# Altium PCB STM32_PCB.PcbDoc
Units mm, origin at the board's own origin, x right, y up, seen from the top; angles counter-clockwise.
Board outline 50.27 x 52.76 mm, 4 copper layers (L1(Signal), L2(GND), L3(GND), L4(Signal)), stack 1.57 mm thick; 35 components, 27 nets, 170 pads, 318 vias.
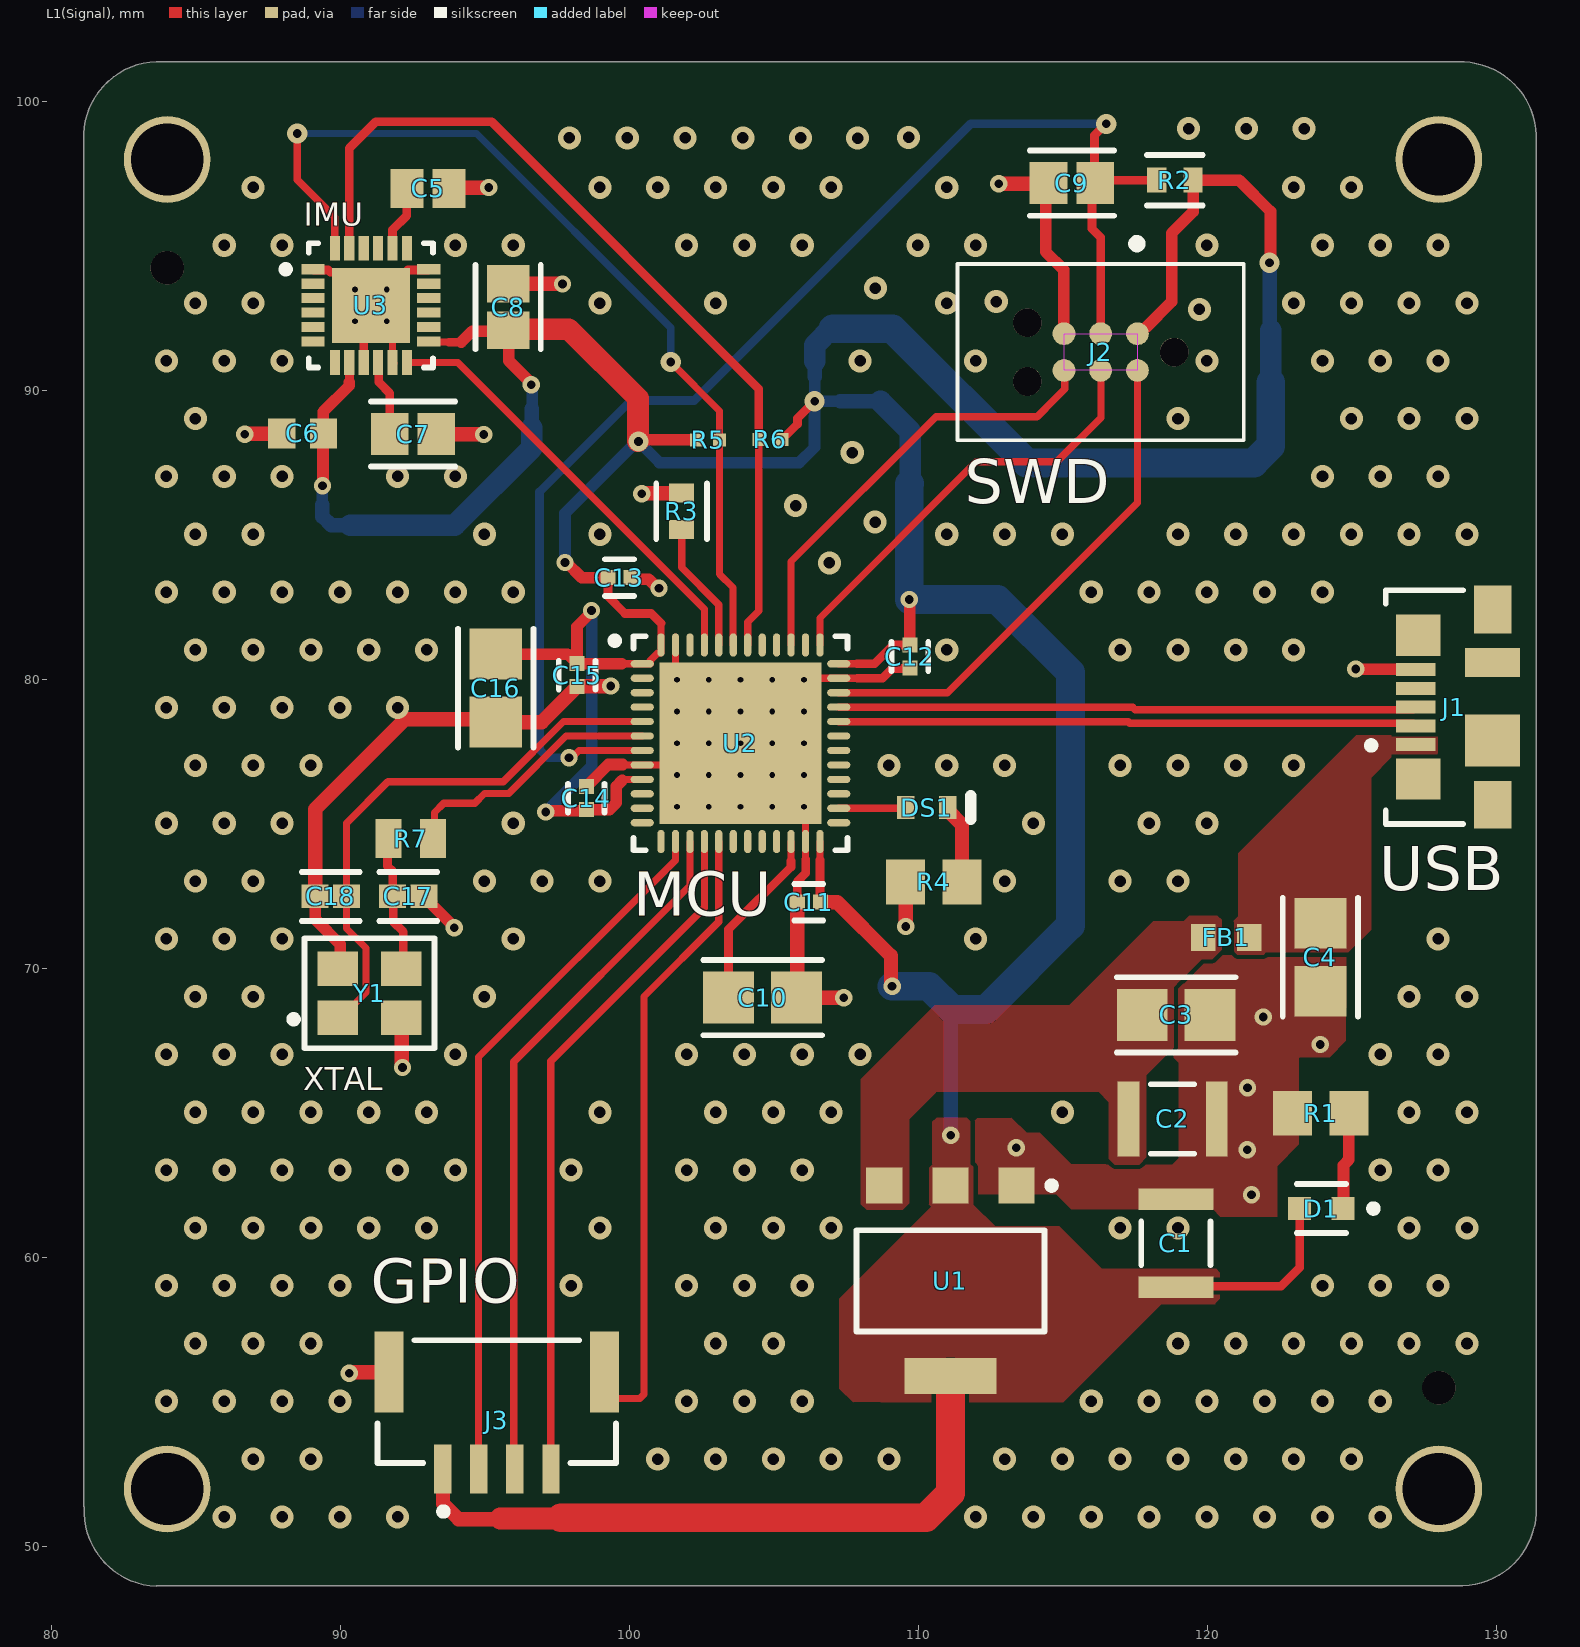
[diagram p0: L1(Signal) view]
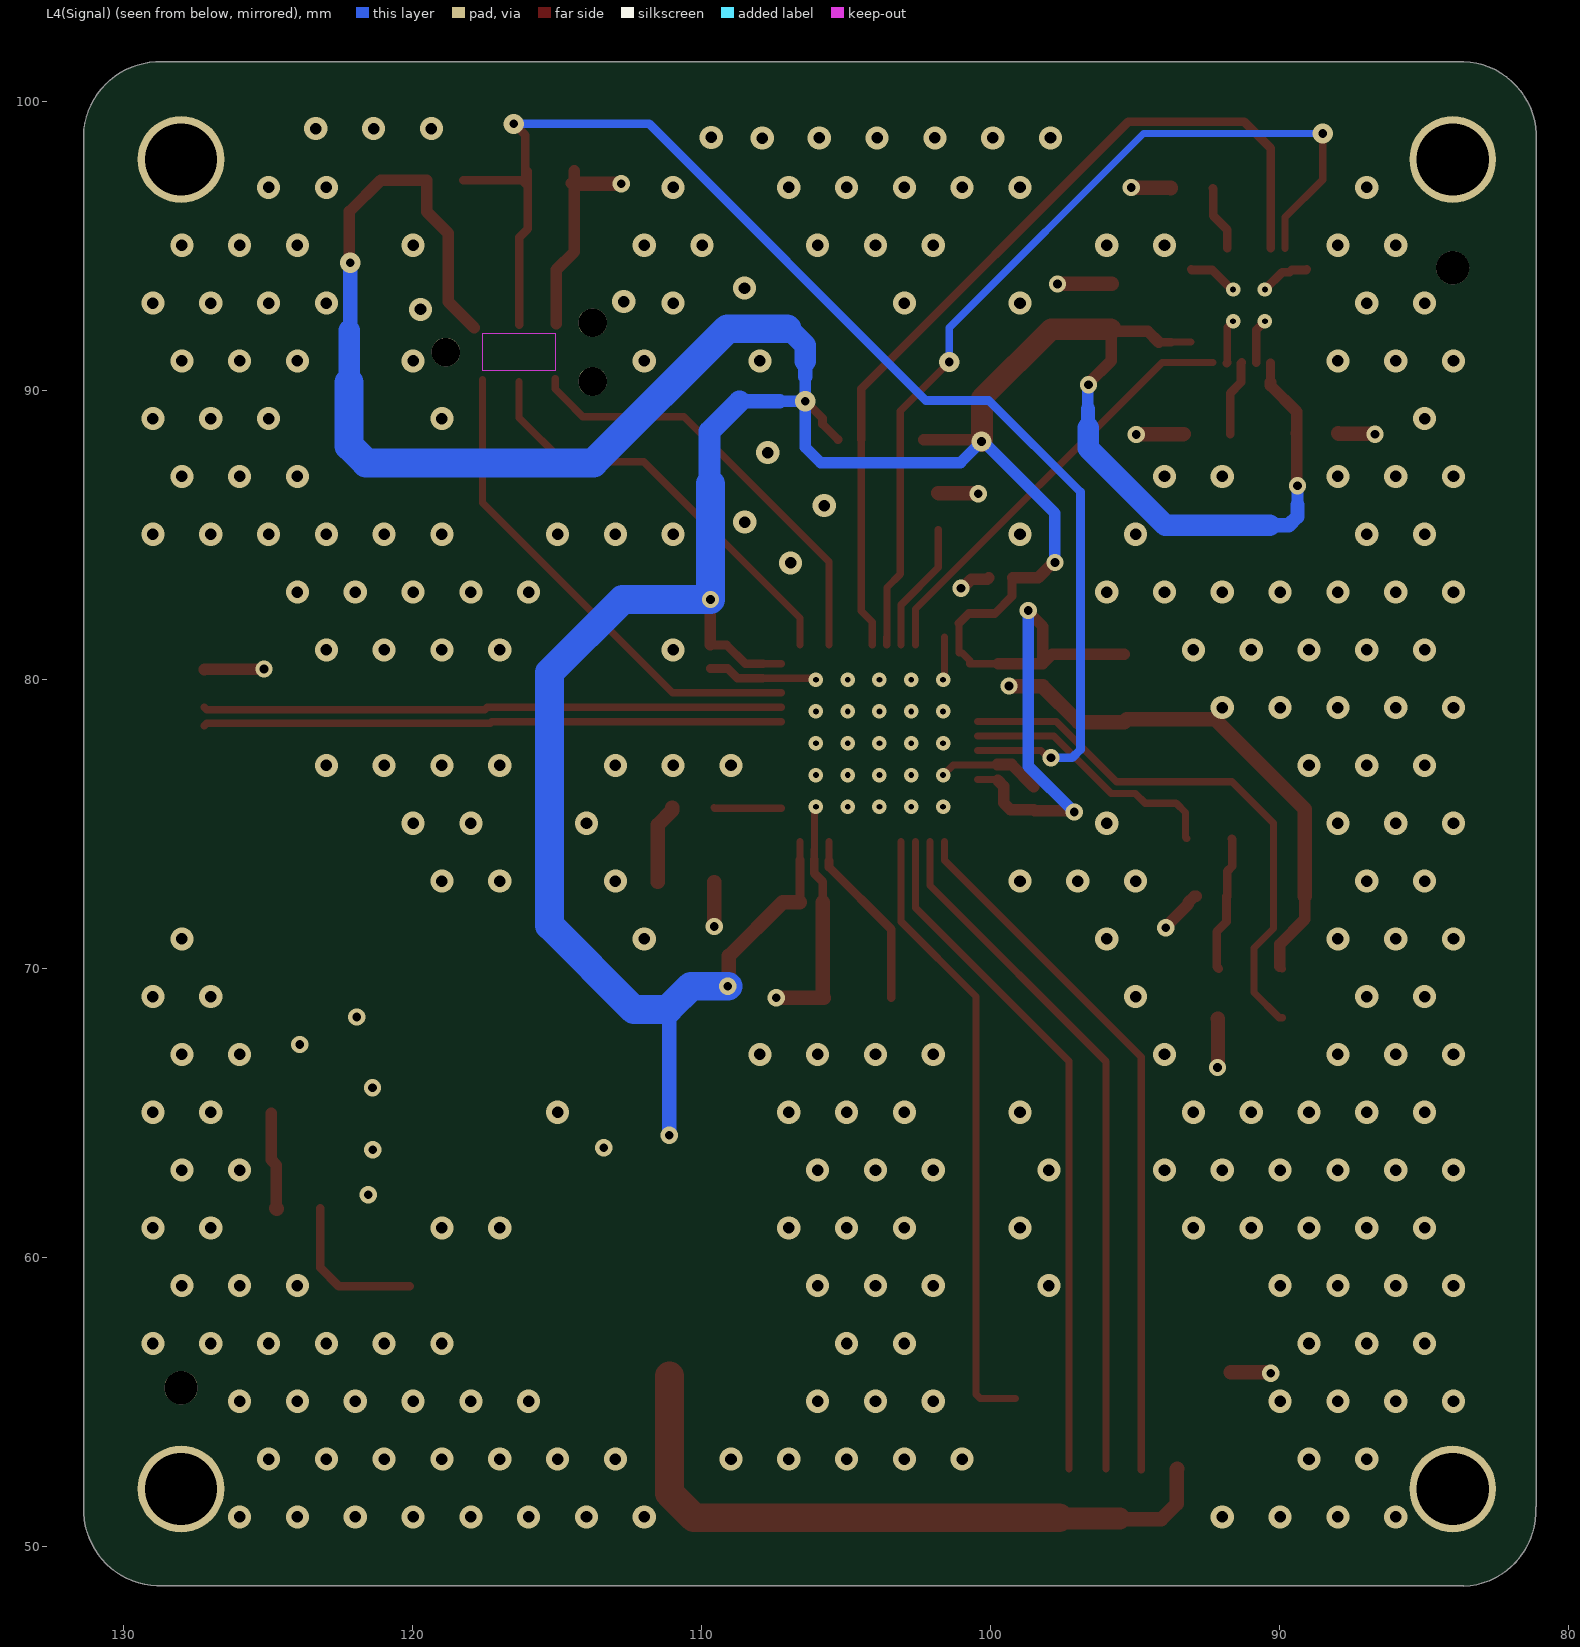
[diagram p1: L4(Signal) view, seen from below]
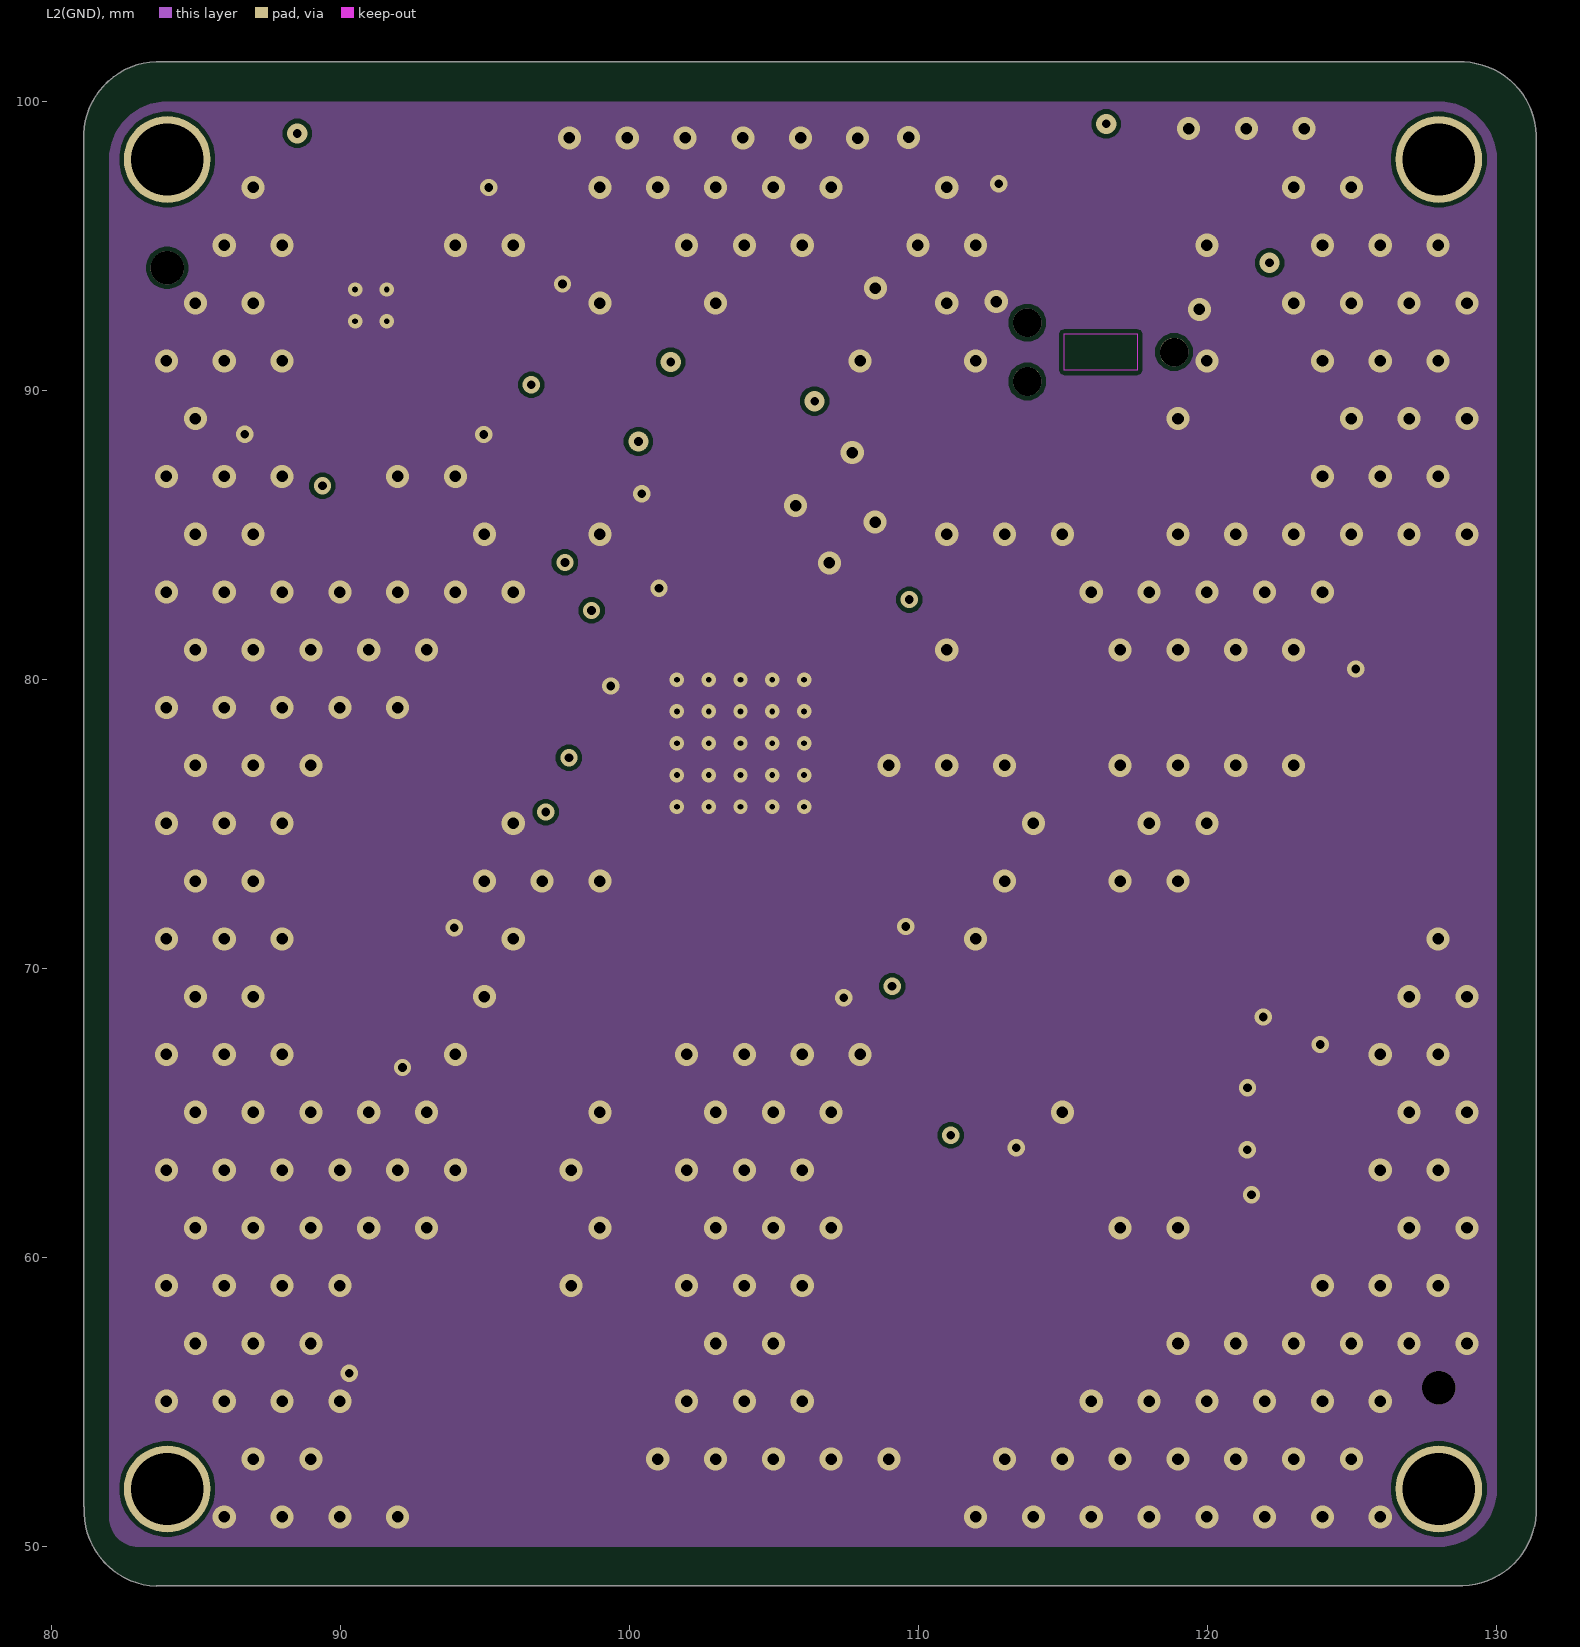
[diagram p2: L2(GND)]
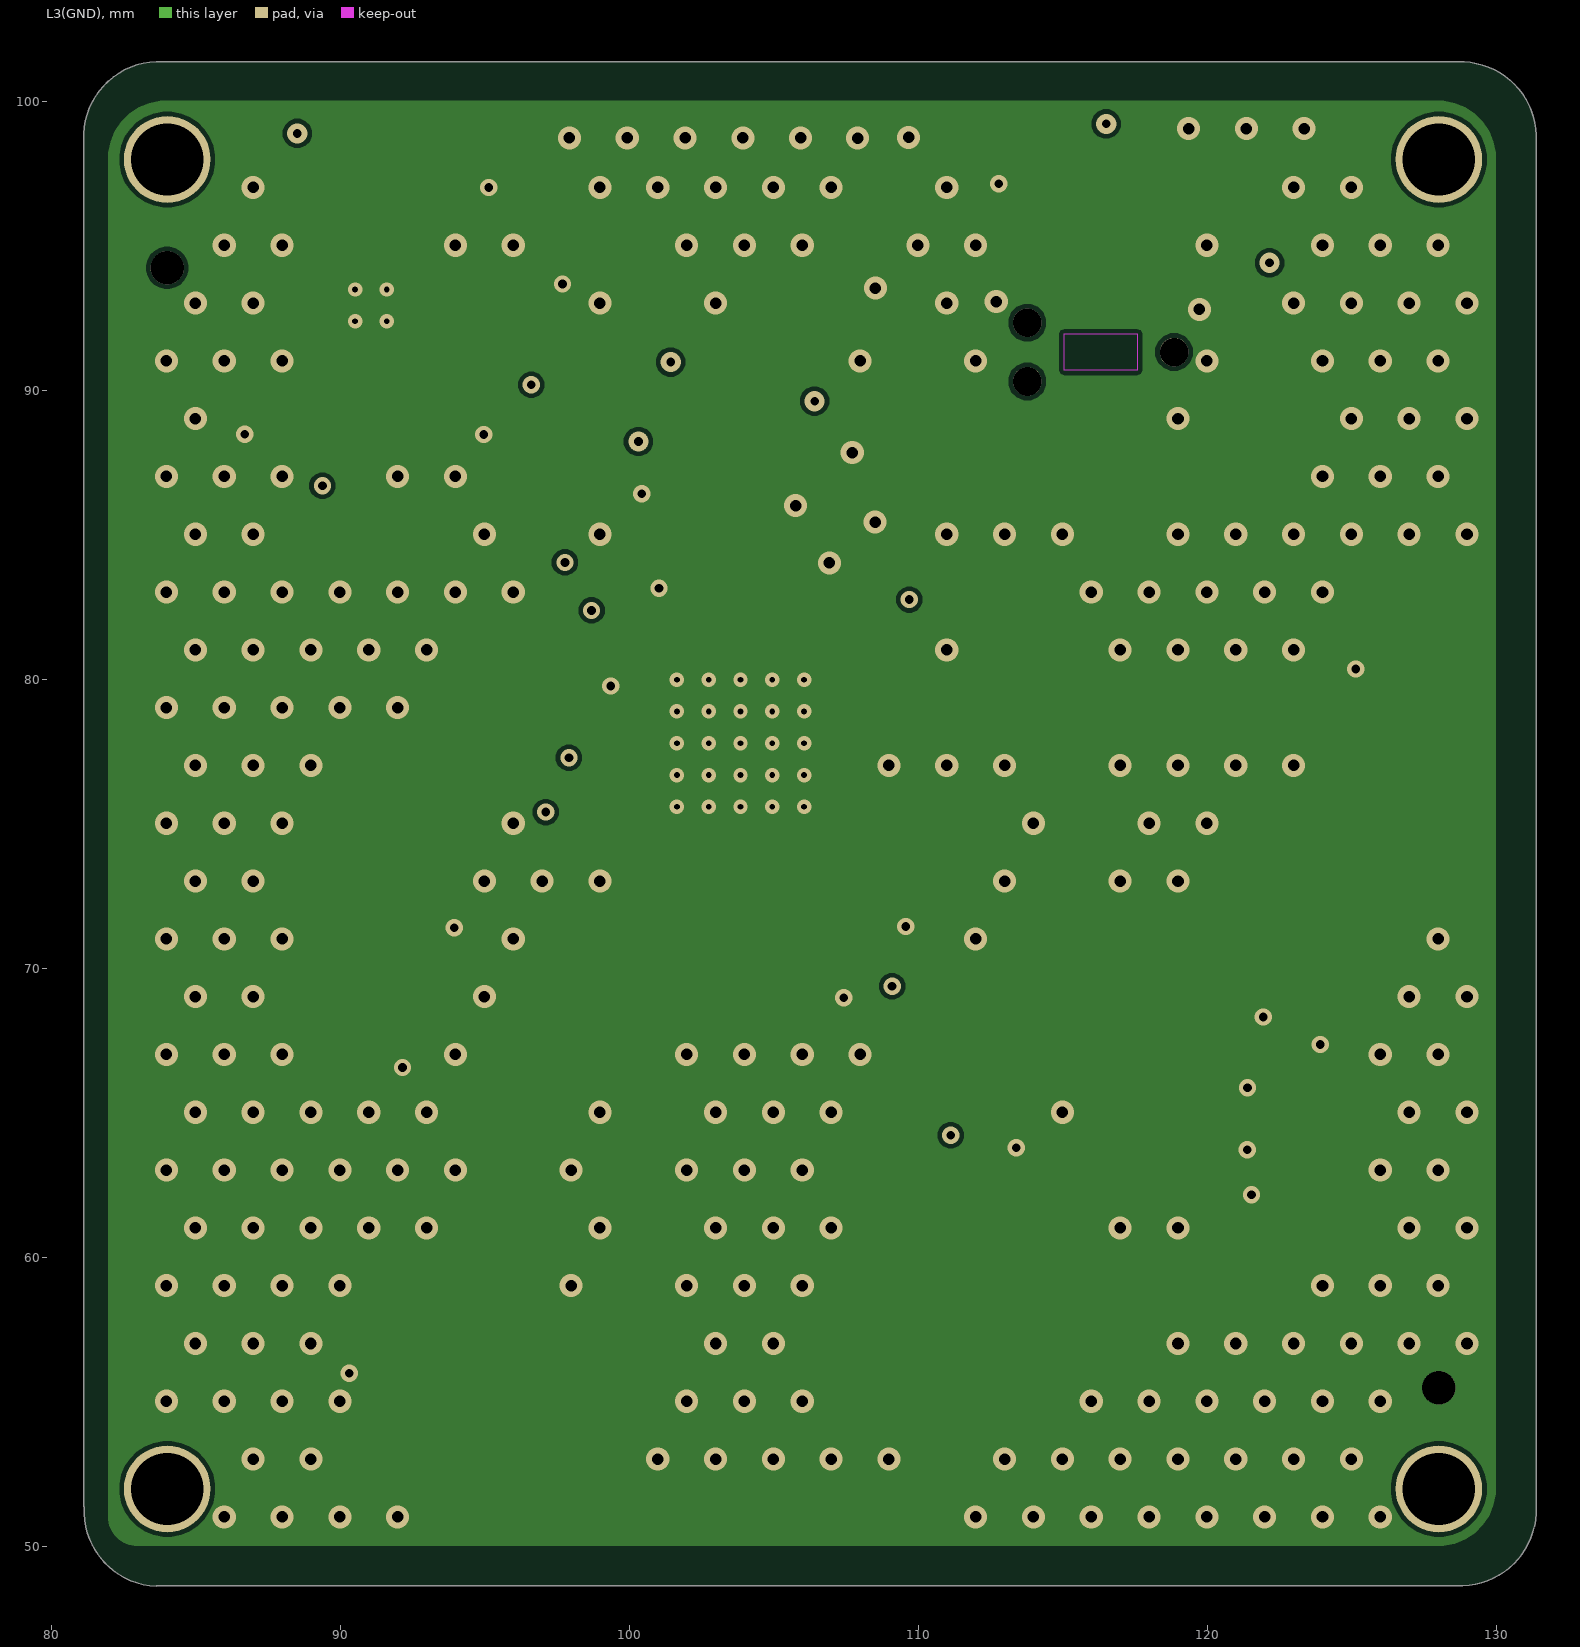
[diagram p3: L3(GND)]
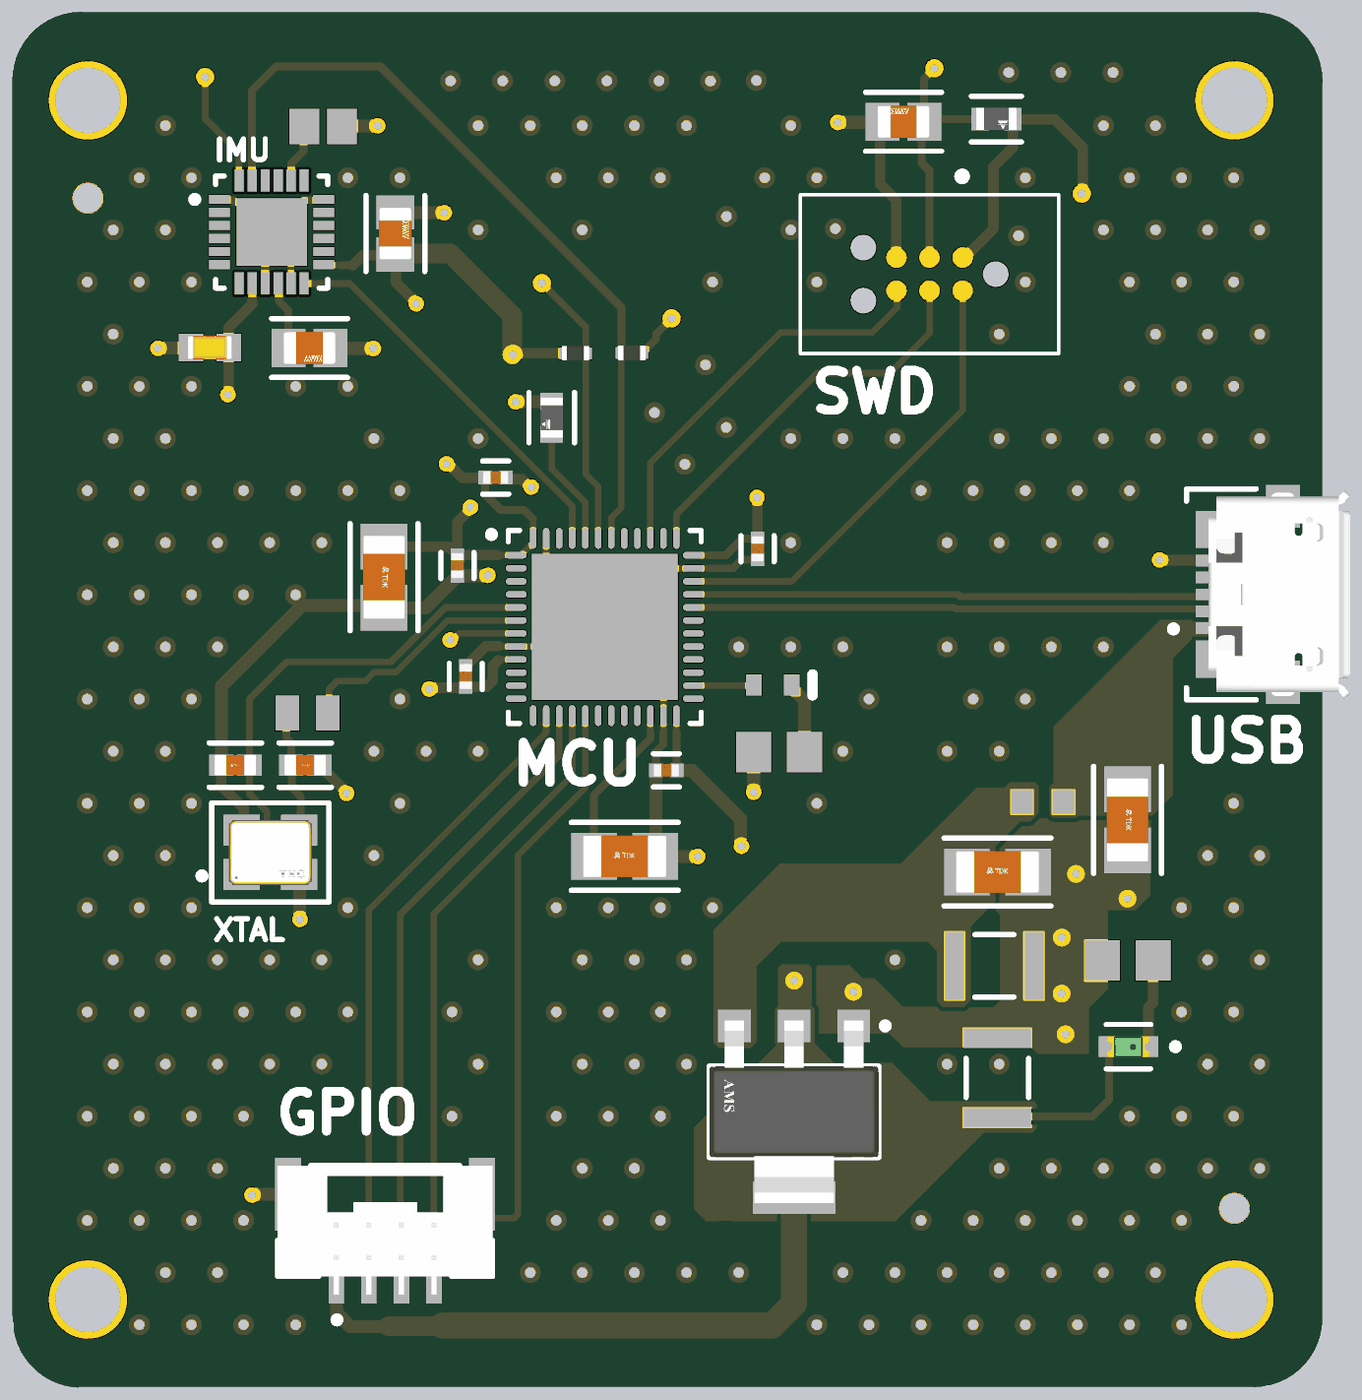
[diagram p4: 3D render of the assembled board from above, using the file's embedded part models]

## Layer stack, top to bottom
Top Solder: solder mask 0.0254, SM-001, Dk 4
L1(Signal): signal copper 0.035
Dielectric 1: prepreg 0.2, PP-017, Dk 4.6
L2(GND): signal copper 0.0175
Dielectric 3: core 1.065, Core-039, Dk 4.6
L3(GND): signal copper 0.0175
Dielectric 5: prepreg 0.2, PP-017, Dk 4.6
L4(Signal): signal copper 0.035
Bottom Solder: solder mask 0.0254, SM-001, Dk 4

## Board outline
81.125,51.375 ccw(c83.75,51.25) 83.625,48.625 83.625,48.649 128.617,48.649 ccw(c128.742,51.274) 131.367,51.149 131.367,98.625 131.375,98.625 ccw(c128.75,98.75) 128.875,101.375 128.875,101.387 83.856,101.387 ccw(c83.731,98.762) 81.106,98.887 81.106,51.375

## Design rules (kind name [scope] priority, off if disabled: settings)
Clearance [All] p1: gap=0.15 ignorepadtopadclearanceinfootprint=FALSE except(0.2: SMDPad-Via)
DiffPairsRouting [All] p1: maxlimit=0.254 minlimit=0.203 mostfreqgap=0.254 toplayer_maxgap=0.203 toplayer_prefgap=0.203 toplayer_minwidth=0.26 toplayer_maxwidth=0.26 toplayer_prefwidth=0.26 bottomlayer_maxgap=0.203 bottomlayer_prefgap=0.203 bottomlayer_minwidth=0.26 bottomlayer_maxwidth=0.26 bottomlayer_prefwidth=0.26 impedanceprofiledriven=TRUE impedanceprofileid={40CFBD0B-AFB4-4522-B9A7-42CAD4421D4E} impedanceprofilevalue=90.000000 maxuncoupledlength=12.7
MinimumSolderMaskSliver [All] p1: minsoldermaskwidth=0.03
PolygonConnect [All] p1: connectstyle=Direct reliefconductorwidth=0.254 reliefentries=4 polygonreliefangle="90 Angle" airgapwidth=0.254
RoutingVias [All] p1: holewidth=0.3 width=0.7 viastyle="Through Hole" minholewidth=0.2 minwidth=0.45 maxholewidth=0.5 maxwidth=0.9
SolderMaskExpansion [All] p1: expansion=0.04 istentingtop=FALSE
UnRoutedNet [All] p1: checkbadconnections=TRUE
Width [All] p1: maxlimit=1 minlimit=0.2 preferedwidth=0.3 midlayer1_minwidth=0.254 midlayer1_maxwidth=0.254 midlayer1_prefwidth=0.254 midlayer2_minwidth=0.254 midlayer2_maxwidth=0.254 midlayer2_prefwidth=0.254 minimp=50.000000 maximp=50.000000 favimp=50.000000
27 further rules are at their usual default settings.

## Classes and differential pairs
net class USB_DIFF: NetJ1_3 USB_D_N USB_D_P
differential pair USB_D: +USB_D_P -USB_D_N

## Components (designator, comment, footprint, x,y, rotation, side; value= is the part's Value field where it differs from the comment)
C1 "GRM32ER61C226KE20L" MURA-1210_H_2.7_L 118.9,60.5 r90 top
C2 "GRM32ER61C226KE20L" MURA-1210_H_2.7_L 118.785,64.8 r0 top
C3 "2u2" FP-C3216-160-0_2-IPC_B 118.909,68.4 r0 top
C4 "2u2" FP-C3216-160-0_2-IPC_B 123.9,70.4 r270 top
C5 "2n2" CAPC2013X94X50LL20T25 93.025,97 r180 top
C6 "10nF" CAPC1608X90X35ML10T15 88.683,88.519 r0 top
C7 "100nF" FP-0805-L_2_01_0_2-W_1_25-IPC_B 92.506,88.5 r0 top
C8 "100nF" FP-0805-L_2_01_0_2-W_1_25-IPC_B 95.8,92.894 r90 top
C9 "100nF" FP-0805-L_2_01_0_2-W_1_25-IPC_B 115.302,97.182 r180 top
C10 "2u2" FP-C3216-160-0_2-IPC_B 104.6,69 r0 top
C11 "100nF" FP-C0402-BB-MFG 106.2,72.3 r180 top value="0.10 μF"
C12 "100nF" FP-C0402-BB-MFG 109.7,80.8 r270 top value="0.10 μF"
C13 "100nF" FP-C0402-BB-MFG 99.649,83.531 r0 top value="0.10 μF"
C14 "100nF" FP-C0402-BB-MFG 98.5,75.9 r90 top value="0.10 μF"
C15 "100nF" FP-C0402-BB-MFG 98.18,80.157 r270 top value="0.10 μF"
C16 "2.2uF" FP-C3216-160-0_2-IPC_B 95.366,79.71 r270 top
C17 "C1608C0G1H100D080AA" FP-C1608-080-0_1-IPC_C 92.341,72.5 r180 top
C18 "C1608C0G1H100D080AA" FP-C1608-080-0_1-IPC_C 89.659,72.5 r0 top
D1 "LTST-C190GKT" FP-LTST-C190GKT-MFG 123.935,61.7 r180 top
DS1 "TLMS1100-GS08" VISH-TLMX1100_V 110.284,75.577 r0 top
FB1 "FBMH1608HL300-T" BEADC1608X90N 120.644,71.084 r180 top
J1 "473460001" FP-473460001-MFG 129.51,79.05 r90 top
J2 "TC2030-IDC-NL" TAG_TC2030-IDC-NL 116.3,91.335 r180 top
J3 "BM04B-GHS-TBT(LF)(SN)" FP-BM04B-GHS-TBT_LF_SN-MFG 95.406,55.018 r180 top
R1 "ERJ-6ENF1001V" RESC2013X70X40ML20T20 123.91,65 r0 top
R2 "10k" FP-MCT0603-IPC_C 118.866,97.282 r0 top
R3 "10k" FP-MCT0603-IPC_C 101.8,85.829 r270 top
R4 "ERJ-6ENF1001V" RESC2013X70X40ML20T20 110.525,73 r180 top
R5 "ERJ-2RKF2201X" RESC1005X40X25LL05T05 102.714,88.296 r180 top
R6 "ERJ-2RKF2201X" RESC1005X40X25LL05T05 104.871,88.311 r0 top
R7 "CRG0805ZR" RESC2013X65X40LL15T20 92.425,74.5 r0 top
U1 "ams1117" FP-ams1117-IPC_C 111.1,59.2 r270 top
U2 "STM32F411CEU6" STM-UFQFPN48_L 103.836,77.8 r0 top
U3 "MPU-6050" IS-QFN-24_V 91.05,92.95 r0 top
Y1 "7M-24.000MEEQ-T" FP-7M-MFG 91,69.15 r0 top

## Footprints (in the part's own frame and the unit in brackets; to place one, negate y for a bottom-side part, rotate by r counter-clockwise, add the part's x,y. Pads: shape width x height; smd on the part's side, far side on the other; paste and mask are expansions set on the pad)
BEADC1608X90N [mm]
  rect 0.84x0.93 smd: 1(-0.795,0) 2(0.795,0)
CAPC1608X90X35ML10T15 [mm] "Chip Capacitor, 2-Leads, Body 1.7x0.9mm, IPC Low Density"
  rect 0.95x1.05 smd: 1(-0.725,0) 2(0.725,0)
  body extent -0.85,-0.45 0.85,0.45, height 0.9
CAPC2013X94X50LL20T25 [mm] "Chip Capacitor, 2-Leads, Body 2.01x1.25mm, IPC High Density"
  rect 1.15x1.35 smd: 1(-0.725,0) 2(0.725,0)
  body extent -1.1,-0.72 1.1,0.72, height 0.94
FP-7M-MFG [mm]
  rect 1.4x1.2 smd paste+0 mask+0: 1(-1.1,-0.85) 2(1.1,-0.85) 3(1.1,0.85) 4(-1.1,0.85)
  silkscreen extent -2.75,-1.9 2.25,1.9, body extent -1.9,-1.55 1.9,1.55, height 0.25
FP-0805-L_2_01_0_2-W_1_25-IPC_B [mm]
  rect 1.305x1.456 smd paste+0 mask+0: 1(-0.806,0) 2(0.806,0)
  silkscreen extent -1.46,-1.13 1.46,1.13, body extent -1.71,-0.98 1.71,0.98, height 0.25
FP-473460001-MFG [mm]
  rect 0.45x1.38 smd paste+0 mask+0: 1(-1.3,2.31) 2(-0.65,2.31) 3(0,2.31) 4(0.65,2.31) 5(1.3,2.31)
  rect 1.425x1.55 smd paste+0 mask+0: 6(-2.488,2.225) 7(2.488,2.225)
  rect 1.65x1.3 smd paste+0 mask+0: 8(-3.375,-0.35) 11(3.375,-0.35)
  rect 1.8x1.9 smd paste+0 mask+0: 9(-1.15,-0.35)
  rect 1x1.9 smd paste+0 mask+0: 10(1.55,-0.35)
  silkscreen extent -4.05,0.67 4.05,3.97, body extent -4.3,-2.48 4.3,3.45, height 0.25
FP-ams1117-IPC_C [mm]
  rect 1.25x1.25 smd paste+0 mask+0: 1(-3.295,2.29) 2(-3.295,0) 3(-3.295,-2.29)
  rect 1.25x3.182 smd paste+0 mask+0: 4(3.295,0)
  silkscreen extent -3.42,-3.25 1.75,3.63, body extent -3.9,-3.35 3.9,3.35, height 0.25
FP-BM04B-GHS-TBT_LF_SN-MFG [mm]
  rect 0.6x1.7 smd paste+0 mask+0: 1(1.875,2.325) 2(0.625,2.325) 3(-0.625,2.325) 4(-1.875,2.325)
  rect 1x2.8 smd paste+0 mask+0: 5(-3.725,-1.025) 6(3.725,-1.025)
  silkscreen extent -4.13,-2.12 4.13,3.92, body extent -4.33,-2.52 4.33,3.27, height 0.25
FP-C0402-BB-MFG [mm]
  rect 0.52x0.52 smd paste+0 mask+0: 1(-0.4,0) 2(0.4,0)
  silkscreen extent -0.5,-0.64 0.5,0.64, body extent -0.8,-0.4 0.8,0.4, height 0.25
FP-C1608-080-0_1-IPC_C [mm]
  rect 0.931x0.812 smd paste+0 mask+0: 1(-0.541,0) 2(0.541,0)
  silkscreen extent -1.01,-0.85 1.01,0.85, body extent -1.11,-0.55 1.11,0.55, height 0.25
FP-C3216-160-0_2-IPC_B [mm]
  rect 1.754x1.806 smd paste+0 mask+0: 1(-1.176,0) 2(1.176,0)
  silkscreen extent -2.05,-1.3 2.05,1.3, body extent -2.3,-1.15 2.3,1.15, height 0.25
FP-LTST-C190GKT-MFG [mm]
  rect 0.8x0.8 smd paste+0 mask+0: 1(-0.75,0) 2(0.75,0)
  silkscreen extent -1.92,-0.85 0.85,0.85, body extent -1.25,-0.55 1.25,0.55, height 0.25
FP-MCT0603-IPC_C [mm]
  rect 0.664x0.862 smd paste+0 mask+0: 1(-0.629,0) 2(0.629,0)
  silkscreen extent -0.96,-0.87 0.96,0.87, body extent -1.06,-0.58 1.06,0.58, height 0.25
IS-QFN-24_V [mm] "QFN, 24-Leads, Body 4x4mm, Pitch 0.5mm, Thermal Pad 2.7x2.6mm"
  rect 0.8x0.35 smd: 1(-2,1.25) 2(-2,0.75) 3(-2,0.25) 4(-2,-0.25) 5(-2,-0.75) 6(-2,-1.25) 13(2,-1.25) 14(2,-0.75) 15(2,-0.25) 16(2,0.25) 17(2,0.75) 18(2,1.25)
  rect 0.35x0.85 smd mask+0.102: 7(-1.25,-1.975) 8(-0.75,-1.975) 9(-0.25,-1.975) 10(0.25,-1.975) 11(0.75,-1.975) 12(1.25,-1.975) 19(1.25,1.975) 20(0.75,1.975) 21(0.25,1.975) 22(-0.25,1.975) 23(-0.75,1.975) 24(-1.25,1.975)
  rect 2.7x2.6 smd: 25(0,0)
  silkscreen extent -3.07,-2.15 2.15,2.15, body extent -2,-2 2,2, height 0.95
MURA-1210_H_2.7_L [mm] "Chip Capacitor, 2-Leads, Body 3.5x2.7mm, IPC High Density"
  rect 0.75x2.6 smd: 1(-1.525,0) 2(1.525,0)
  silkscreen extent -0.75,-1.2 0.75,1.2, body extent -1.75,-1.35 1.75,1.35, height 2.7
RESC1005X40X25LL05T05 [mm] "Chip Resistor, 2-Leads, Body 1.05x0.55mm, IPC High Density"
  rect 0.45x0.45 smd: 1(-0.4,0) 2(0.4,0)
  body extent -0.53,-0.28 0.53,0.28, height 0.4
RESC2013X65X40LL15T20 [mm] "Chip Resistor, 2-Leads, Body 2.00x1.30mm, IPC High Density"
  rect 0.9x1.35 smd: 1(-0.775,0) 2(0.775,0)
  body extent -1.07,-0.72 1.07,0.72, height 0.65
RESC2013X70X40ML20T20 [mm] "Chip Resistor, 2-Leads, Body 2.00x1.25mm, IPC Low Density"
  rect 1.35x1.55 smd: 1(-0.975,0) 2(0.975,0)
  body extent -1.1,-0.72 1.1,0.72, height 0.7
STM-UFQFPN48_L [mm] "QFN, 48-Leads, Body 7.1x7.1mm, Pitch 0.5mm, Thermal Pad 5.6x5.6mm, IPC High Density"
  oval 0.8x0.25 smd: 1(-3.4,2.75) 2(-3.4,2.25) 3(-3.4,1.75) 4(-3.4,1.25) 5(-3.4,0.75) 6(-3.4,0.25) 7(-3.4,-0.25) 8(-3.4,-0.75) 9(-3.4,-1.25) 10(-3.4,-1.75) 11(-3.4,-2.25) 12(-3.4,-2.75) 25(3.4,-2.75) 26(3.4,-2.25) 27(3.4,-1.75) 28(3.4,-1.25) 29(3.4,-0.75) 30(3.4,-0.25) 31(3.4,0.25) 32(3.4,0.75) 33(3.4,1.25) 34(3.4,1.75) 35(3.4,2.25) 36(3.4,2.75)
  oval 0.25x0.8 smd: 3(-2.75,3.4) 13(-2.75,-3.4) 14(-2.25,-3.4) 15(-1.75,-3.4) 16(-1.25,-3.4) 17(-0.75,-3.4) 18(-0.25,-3.4) 19(0.25,-3.4) 20(0.75,-3.4) 21(1.25,-3.4) 22(1.75,-3.4) 23(2.25,-3.4) 24(2.75,-3.4) 37(2.75,3.4) 38(2.25,3.4) 39(1.75,3.4) 40(1.25,3.4) 41(0.75,3.4) 42(0.25,3.4) 43(-0.25,3.4) 44(-0.75,3.4) 45(-1.25,3.4) 46(-1.75,3.4) 47(-2.25,3.4)
  rect 5.6x5.6 smd: 49(0,0)
  silkscreen extent -4.47,-3.7 3.7,3.7, body extent -3.55,-3.55 3.55,3.55, height 0.6
TAG_TC2030-IDC-NL [mil]
  round 30.98 smd paste-39.37: 1(-50,-25) 2(-50,25) 3(0,-25) 4(0,25) 5(50,-25) 6(50,25)
  round 39.02 hole 39.02 unplated: ""(-100,0) ""(100,-40) ""(100,40)
  Keep-Out Layer region: 50,-25.03 -50.06,-25.03 -50.06,25 50,25
  silkscreen extent -195,-154 195,120
VISH-TLMX1100_V [mm] "SMD, 2-Leads, Body 1.6x0.8mm"
  rect 0.6x0.8 smd: 1(-0.725,0) 2(0.725,0)
  silkscreen extent 1.53,-0.4 1.53,0.4, body extent -0.8,-0.4 0.8,0.4, height 0.65

## Part data
C1 C2: library part CMP-2000-06361-1, "Chip Monolithic Ceramic Capacitor, 22 uF, +/- 10%, -55 to 85 degC, 2-Pin SMD (1210), RoHS, Tape and Reel", Capacitance=22µF, Manufacturer=Murata, Operating Temperature=-55°C~85°C, Package / Case=1210(3225Metric), Package Description="2-Pin Surface Mount Device, Body 3.2 x 2.5 mm", Package Reference=1210, Ratings=-, Standard Package=1,000, Temperature Coefficient=X5R, Tolerance=±10%, Voltage - Rated=16V, Applications=GeneralPurpose, Catalog Drawings=GRMSeries_1210_2.5, Category=Capacitors, Datasheet URL=https://datasheet.ciiva.com/26915/getdatasheetpartid-88858-26915376.pdf, Datasheet Version=05/2014, Family=CeramicCapacitors, Featured Product=GA3SafetyRecognizedCapsandHi-CapMLCC, Features=-, Height - Seated (Max)=-, Lead Spacing=-, Lead Style=-, Manufacturer URL=http://www.murata.com/, Mounting Technology=SurfaceMount, Mounting Type=SurfaceMount,MLCC, Online Catalog=GRMSeries, Other Names=490-1882-2, Packaging=Tape&Reel(TR), Product Training Modules=High-CapMultilayerCeramicCapacitors, Series=GRM, Size / Dimension="0.126\"Lx0.098\"W(3.20mmx2.50mm)", Thickness (Max)="0.106\"(2.70mm)", Voltage Rating DC=16V
C3 C4 C10: library part CMP-08246-004303-1, "Multilayer Ceramic Capacitors 2.2uF ±10% 100V X7S SMD 1206", Capacitance=2.2uF, Case Code (Imperial)=1206, Case Code (Metric)=3216, Dielectric=X7S, Max Operating Temperature=125°C, Min Operating Temperature=-55°C, Package Quantity=1, Resistor Type=Ceramic, Tolerance=10%, Voltage=100V, Case/Package=1206, Construction=Flat, Depth=1.6mm, Height=1.6mm, Lead Free="Lead Free", Length=3.2mm, Mount="Surface Mount", Number of Pins=2, Packaging="Tape and Reel", Radiation Hardening=No, REACH SVHC="No SVHC", RoHS Compliant=Yes, Series=C, Termination=SMD/SMT, Thickness=0.071inch, Voltage Rating=100V, Voltage Rating (DC)=100V, Weight=0.000571oz, Width=0.063inch
C5: library part CMP-2007-04184-1, Manufacturer="AVX Interconnect / Elco", Part Number=08051C222JAT2A
C6: library part CMP-2100-03642-1, "Chip Capacitor, 10 nF, +/- 10%, 50 V, -55 to 125 degC, 0603 (1608 Metric), RoHS, Tape and Reel", Case Code (Imperial)=0603, Case Code (Metric)=1608, Dielectric=X7R, Dielectric Material=Ceramic, Insulation Resistance=10GR, Manufacturer=Murata, Max Operating Temperature=125degC, Min Operating Temperature=-55degC, Package Description="2-Pin Surface Mount Device, Body 1.6 x 0.8 mm", Package Quantity=1, Tolerance=10%, Voltage=50V, Capacitance=10nF, Case/Package=0603, Datasheet URL=http://search.murata.co.jp/Ceramy/image/img/A01X/G101/ENG/GRM188R71H103KA01-01.pdf, Datasheet Version=42401.0, Depth=0.8mm, Height=0.8mm, Lead Free=LeadFree, Length=1.6mm, Manufacturer URL=http://www.murata.com/, Material=Ceramic, Mount=SurfaceMount, Number of Pins=2, Package Reference=0603, Packaging=TapeandReel, REACH SVHC=Unknown, RoHSCompliant=True, Termination=SMD/SMT, Thickness=0.035inch, Voltage Rating=50V, Voltage Rating (DC)=50V, Width=0.031inch
C7 C8 C9: library part CMP-2007-04172-2, "Automotive Ceramic Capacitor, 0805, 100nF, 10%, X7R, 15%, 100V", Case Code (Imperial)=0805, Case Code (Metric)=2012, Dielectric=X7R, Dielectric Material=Ceramic, Max Operating Temperature=125°C, Min Operating Temperature=-55°C, Package Quantity=1, Ratings=AEC-Q200, Tolerance=10%, Voltage=100V, Capacitance=100nF, Case/Package=0805, Construction=Flat, Depth=1.25mm, Height=1.4mm, Lead Free="Lead Free", Length=2.01mm, Mount="Surface Mount", Number of Pins=2, Packaging="Tape and Reel", Radiation Hardening=No, REACH SVHC="No SVHC", RoHS Compliant=Yes, Series=-, Termination=SMD/SMT, Thickness=0.055inch, Voltage Rating=100V, Voltage Rating (DC)=100V, Width=0.049inch
C11 C12 C13 C14 C15: library part CMP-1034-02068-3, "CAP CER 0.1UF 16V 5% X7R 0402", Capacitance="0.10 μF", Manufacturer=Kemet, Manufacturer Part Number=C0402C104J4RACTU, Package=C0402-BB, Temperature="-55°C to +125°C", Temperature Characteristic=X7R, Temperature Coefficient=15%, Temperature Range High=+125°C, Temperature Range Low=-55°C, Tolerance=0.05, Voltage Rating="16 V", Automotive=No, Category=Cap, ComponentLink2Description=Datasheet, ComponentLink2URL=https://content.kemet.com/datasheets/KEM_C1002_X7R_SMD.pdf, Device Class L1="Passive Components", Device Class L2=Capacitors, Device Class L3="Ceramic Capacitors", Digikey Description="CAP CER 0.1UF 16V 5% X7R 0402", Height=0.55mm, Ipc Land Pattern Name=CAPC10050X50, Lead Free=Yes, Material=Ceramic, Mouser Description="CAP CER 0.1UF 16V X7R 0402", Octopart=https://octopart.com/c0402c104j4ractu-kemet-12573893, RoHS=TRUE
C16: library part CMP-08246-004303-1, "Multilayer Ceramic Capacitors 2.2uF ±10% 100V X7S SMD 1206", Case Code (Imperial)=1206, Case Code (Metric)=3216, Dielectric=X7S, Max Operating Temperature=125°C, Min Operating Temperature=-55°C, Package Quantity=1, Resistor Type=Ceramic, Tolerance=10%, Voltage=100V, Capacitance=2.2uF, Case/Package=1206, Construction=Flat, Depth=1.6mm, Height=1.6mm, Lead Free="Lead Free", Length=3.2mm, Mount="Surface Mount", Number of Pins=2, Packaging="Tape and Reel", Radiation Hardening=No, REACH SVHC="No SVHC", RoHS Compliant=Yes, Series=C, Termination=SMD/SMT, Thickness=0.071inch, Voltage Rating=100V, Voltage Rating (DC)=100V, Weight=0.000571oz, Width=0.063inch
C17 C18: library part CMP-08246-005843-1, "Multilayer Ceramic Capacitors 10pF ±0.5pF 50V C0G SMD 0603", Capacitance=10pF, Case Code (Imperial)=0603, Case Code (Metric)=1608, Dielectric=C0G, Dielectric Material=Ceramic, Max Operating Temperature=125°C, Min Operating Temperature=-55°C, Package Quantity=1, Temperature Coefficient=30ppm/°C, Tolerance=5%, Voltage=50V, Case/Package=0603, Construction=Flat, Depth=0.8mm, Height=0.8mm, Lead Free="Lead Free", Length=1.6mm, Mount="Surface Mount", Number of Pins=2, Packaging="Tape and Reel", Radiation Hardening=No, REACH SVHC="No SVHC", RoHS Compliant=Yes, Series=C, Termination=SMD/SMT, Thickness=0.037inch, Voltage Rating=50V, Voltage Rating (DC)=50V, Weight=7.1E-05oz, Width=0.031inch
D1: library part CMP-22017-000005-2, "LED GREEN CLEAR CHIP SMD", Case Code (Imperial)=0603, Case Code (Metric)=1608, Color=Green, Forward Current=30mA, Forward Voltage=2.1V, Lens Color=Colorless, Max Operating Temperature=85°C, Min Operating Temperature=-55°C, Package Quantity=1, Power Dissipation=100mW, Reverse Voltage=5V, Test Current=10mA, Voltage=2V, Case/Package=0603, Depth=0.8mm, Dominant Wavelength=569nm, Height=0.8mm, Illumination Color=Green, Lead Free="Lead Free", Length=1.6mm, Lens Style=Clear, Lens Transparency=Clear, Luminous Intensity=6mcd, Mount="Surface Mount", Number of Elements=1, Number of LEDs=1, Number of Pins=2, Packaging="Tape and Reel", Power Rating=100mW, Radiation Hardening=No, Viewing Angle=130°, Wavelength=565nm, Width=0.8mm
DS1: library part CMP-1666-00027-1, "LED, RED, 2.1 V, -40 to 100 degC, 2-Pin SMD (0603), RoHS, Tape and Reel", Capacitance="12 pF", Case Code (Imperial)=0603, Case Code (Metric)=1608, Max Operating Temperature=125degC, Min Operating Temperature=-55degC, Package Quantity=4000, Resistance="100000000000 Ohm", Tolerance=5%, Type (Capacitors)=C0G, Voltage Rating="50 V", Case/Package=0603, ComponentLink1Description="Manufacturer URL", ComponentLink1URL=http://www.vishay.com/, ComponentLink2Description=Datasheet, ComponentLink2URL=http://www.vishay.com/docs/83173/tlmb1100.pdf, DatasheetVersion="Rev. 2.7, 03/2016", Height="0.8 mm", Length="1.6 mm", Mount="Surface Mount", PackageDescription="2-Pin Surface Mount Device, Body 1.6 x 0.8 mm", PackageReference=TLMX1100, Packaging="Tape and Reel", Pins=2, Radiation Hardening=No, REACH SVHC="No SVHC", RoHSCompliant=True, Voltage Rating (DC)="50 V", Width="0.8 mm"
FB1: library part CMP-006-00021-1, "FERRITE BEAD, 0.028OHM, 2.5A, 0603, FULL REEL", Case/Package=None, Availability=Unavailable, Component Type=Standard, Design Item ID=FBMH1608HL300-T, MP=FBMH1608HL300-T, Pins=2, Price=None, Source=FBMH1608HL300-T.SchLib
J1: library part CMP-2000-05246-2, "CONN RCPT USB2.0 MICRO B SMD R/A", Current Rating=1.8A, Manufacturer=Molex, Package=0, Temperature="-30°C to +85°C", Temperature Range High=+85°C, Temperature Range Low=-30°C, Voltage Rating=30V, Automotive=No, Category=Conn, ComponentLink2Description=Datasheet, ComponentLink2URL=https://www.molex.com/webdocs/datasheets/pdf/en-us/0473460001_IO_CONNECTORS.pdf, Conn Orientation="Right Angle", Contact Material=Gold,Nickel, Device Class L1=Connectors, Device Class L2="USB Connectors", Device Class L3=unset, Digikey Description="CONN RCPT USB2.0 MICRO B SMD R/A", Footprint Url=https://www.molex.com/pdm_docs/sd/473460001_sd.pdf, Height=2.945mm, Is Female=yes, Lead Free=Yes, Manufacturer Part Number=473460001, Number Of Contacts=5, Octopart=https://octopart.com/47346-0001-molex-7164928, Pitch=0.65mm, RoHS=TRUE, Shielding=true, Usb Standard="USB 2.0"
J2: library part CMP-003-000003-1, "CABLE ADAPTER 6 POS", Package=None, Availability=Unavailable, Component Type=Standard, Design Item ID=TC2030-IDC-NL, MP=TC2030-IDC-NL, Pin Count=6, Price=None, Source=TC2030-IDC-NL.SchLib
J3: library part CMP-17439-000062-2, "CONN HEADER SMD 4POS 1.25MM", Case/Package=SMD/SMT, Current Rating=1A, Housing Color=Natural, Max Operating Temperature=85°C, Min Operating Temperature=-25°C, Voltage Rating=50V, Contact Material=Bronze, Contact Plating=Tin, Gender=Male, Housing Material=Nylon, Lead Free="Lead Free", Number Of Contacts=4, Number of Positions=4, Number of Rows=4, Orientation=Straight, Packaging="Cut Tape", Pitch=1.25mm, REACH SVHC="No SVHC", Series=GH, Termination=Crimp, Voltage Rating (AC)=50V, Wire/Cable Gauge=26AWG
R1 R4: library part CMP-2001-04375-5, "Chip Resistor, 1 KOhm, +/- 1%, 0.125 W, -55 to 155 degC, 0805 (2012 Metric), RoHS, Tape and Reel", Manufacturer=Panasonic, Max Operating Temperature="155 degC", Min Operating Temperature="-55 degC", Package Quantity=1, Voltage Rating="150 V", ComponentLink1Description="Manufacturer URL", ComponentLink1URL=http://www.panasonic.com/, ComponentLink2Description=Datasheet, ComponentLink2URL=http://industrial.panasonic.com/cdbs/www-data/pdf/RDA0000/AOA0000C86.pdf, DatasheetVersion=04/2015, Height="0.6 mm", Length="2 mm", Mount="Surface Mount", Mounting Technology="Surface Mount", PackageDescription="2-Pin Surface Mount Device, Body 2 x 1.25 mm", PackageReference=0805, Packaging="Cut Tape", REACH SVHC=Yes, RoHSCompliant=true
R2 R3: library part CMP-02407-000418-1, "RES SMD 100 OHM 1% 1/8W 0603", Case Code (Imperial)=0603, Case Code (Metric)=1608, Max Operating Temperature=125°C, Max Power Dissipation=125mW, Min Operating Temperature=-55°C, Package Quantity=1, Power Rating=100mW, Resistance=10kR, Temperature Coefficient=50ppm/°C, Tolerance=1%, Voltage Rating=75V, Case/Package=0603, Composition="Thin Film", Contact Plating=Tin, Depth=0.85mm, Height=0.022inch, Lead Free="Lead Free", Length=1.55mm, Military Standard=Not, Mount="Surface Mount", Number of Terminations=2, Packaging="Tape and Reel", Radiation Hardening=No, Voltage Rating (DC)=75V, Width=0.8mm
R5 R6: library part CMP-2002-01132-2, "Precision Thick Film Chip Resistor, 2.2 kOhm, 100 mW, 1%, -55 to 155 degC, 2-Pin SMD (0402), RoHS, Tape and Reel", Manufacturer=Panasonic, Package Description="2-Pin Surface Mount Device, Body 1 x 0.5 mm", Package Reference=0402, Rated Power=0.1W, Resistance=2.2kO, Temp Coefficient=±100ppm/°C, Tolerance (%)=±1%, Datasheet URL=https://datasheet.ciiva.com/11821/0900766b80f80784-11821273.pdf, Datasheet Version=03/2011, Manufacturer URL=http://www.panasonic.com/, Mounting Technology=SurfaceMount, Size Code=0402
R7: library part CMP-2000-07514-1, "Chip Resistor, 0 Ohm, 0.125 W, -55 to 125 degC, 0805 (2012 Metric), RoHS, Tape and Reel", Case Code (Imperial)=0805, Case Code (Metric)=2012, Manufacturer="TE Connectivity", Max Operating Temperature=125degC, Min Operating Temperature=-55degC, Number of Resistors=1, Package Description="2-Pin Surface Mount Device, Body 2 x 1.25 mm", Package Quantity=5000, Package Reference=RESC2013X65X40L15T20, Power Rating=125mW, Resistance=0mOhm, Tolerance=0%, Voltage Rating=150V, Case\/Package=0805, Composition=ThickFilm, Datasheet URL=www.te.com/commerce/DocumentDelivery/DDEController?Action=showdoc&DocId=Customer+Drawing%7F1623401%7FBA%7Fpdf%7FEnglish%7FENG_CD_1623401_BA.pdf%7F1623401-1, Datasheet Version="Rev. BA, 12/2009", Depth=1.25mm, ELV=Compliant, Height=0.55mm, Length=2mm, Manufacturer URL=http://www.te.com/, Mount=SurfaceMount, Mounting Technology=SurfaceMount, Number of Terminations=2, Packaging=TapeandReel, Radiation Hardening=No, RoHSCompliant=true, Termination=Solder, Weight=0.000194oz, Width=1.25mm
U1: library part CMP-209535-000002-1, "1A LOW DROPOUT VOLTAGE REGULATOR", RoHS Compliant=Yes
U2: library part CMP-0243-00165-1, "ARM Cortex-M4 32-bit MCU+FPU, 512 KB Flash, 128 KB RAM, 36 I/Os, 48-Pin UFQFPN, -40 to 85 degC, Tray", I/Os (High Current)=36, Operating Frequency(F) (Processor speed) (MHz)=100, Package Description=UFQFPN48, Package Reference="48-Pin Ultra Thin Fine Pitch Quad Flat No-Lead, 7 x 7 x 0.6 mm Body, 0.5 mm Pitch, Exposed Pad", Supply Voltage(Vcc) min (V)=1.7, ComponentLink1Description="Manufacturer URL", ComponentLink1URL=http://www.st.com/, ComponentLink2Description=Datasheet, ComponentLink2URL=http://www.st.com/st-web-ui/static/active/en/resource/technical/document/datasheet/DM00115249.pdf, Core="ARM Cortex-M4", DatasheetVersion="Rev. 6", FLASH Size (Prog) (kB)=512, Internal RAM Size (kB)=128, Mounting Technology="Surface Mount", Packing=Tray
U3: library part CMP-1753-00002-2, "3-Axis Gyroscope, Accelerometer and a Digital Motion Processor(TM) (DMP), 2.375 to 3.46 V, -40 to 85 degC, 24-Pin QFN, RoHS, Tape and Reel", Manufacturer=InvenSense, Standard Package=5,000, Category=Sensors,Transducers, Datasheet URL=http://datasheet.octopart.com/MPU-6050-InvenSense-datasheet-14421344.pdf, Datasheet Version="Rev. 3.3, 05/2012", Dynamic Catalog=MPU-6000™Series, Family=Multifunction, Featured Product=MPU-60506-Axis,IntegratedI²CSolution, Manufacturer URL=http://www.invensense.com/, Online Catalog=MPU-6000™Series, Other Names="1428-1007-2 / MPU6050", Output Type=Digital, Sensor Type=MotionTracking, Unit PriceUSD=Digital
Y1: library part CMP-18717-000318-1, "Crystal 24MHz, 10ppm, 10pF, 50Ω", Case/Package=SMD/SMT, ESR (Equivalent Series Resistance)=60R, Frequency=24MHz, Frequency Stability=10ppm, Load Capacitance=10pF, Max Operating Temperature=70°C, Min Operating Temperature=-20°C, Package Quantity=3000, Depth=2.5mm, Frequency Tolerance=10ppm, Height=0.031inch, Lead Free="Lead Free", Length=3.2mm, Mount="Surface Mount", Number of Pins=4, Packaging="Tape and Reel", REACH SVHC="No SVHC", Series=7M, Termination=SMD/SMT, Tolerance=10ppm, Width=0.098inch

## Free pads (board coordinates)
  round 3 hole 2.5: 17(84,52) 17(84,98) 17(128,52) 17(128,98)
  round 1.152 hole 1.152: TH(84,94.25) TH(128,55.5)

## Via types
v1: diameter 0.8, hole 0.4, L1(Signal) to L4(Signal), tented both sides, 254 vias
v2: diameter 0.6, hole 0.3, L1(Signal) to L4(Signal), 29 vias
v3: diameter 0.5, hole 0.2, L1(Signal) to L4(Signal), 29 vias
v4: diameter 0.7, hole 0.3, L1(Signal) to L4(Signal), 6 vias

## Nets (pads, with @x,y where several pads share a name; then routed paths per layer and width w, separated by ;. In a path a pad name is that pad's centre, name@x,y a point inside that pad or via, vN(x,y) a via of type N, cw(c..) or ccw(c..) an arc to the next point about the centre after c; other vN are vias at no path point)
+5V: C2.1 C3.1 FB1.2 U1.3
GND: C1.2 C2.2 C3.2 C4.2 C5.1 C6.1 C7.2 C8.2 C9.2 C10.2 C11.2 C12.2 C13.2 C14.2 C15.2 C16.2 C17.1 C18.1 J1.5 J2.5 J3.6 pad.TH@128,55.5 R1.1 R3.1 R4.2 U1.1 U2.8 U2.23 U2.35 U2.47 U2.49 U3.1 U3.9 U3.11 U3.18 U3.25 Y1.2 Y1.4 | length 66
  L1(Signal) w0.25: Y1.4 Y1.4@89.986,70.086 ; v3(91.6,92.4) 91.8,92.2 U3.11 ; 99.756,77.065 99.77,77.05 U2.8@100.433,77.05 ; U2.8 101.286,77.05 v3(101.636,76.7) ; U2.47@101.583,81.479 101.586,81.475 U2.47@101.586,81.204 ; U2.47 101.586,80.05 v3(101.636,80) ; v3(106.036,75.6) 106.086,75.55 U2.23 ; v3(106.036,80) 106.086,80.05 U2.35 107.511,80.05 107.877,80.05 ; U2.23@106.086,74.398 106.086,74.125 106.089,74.123 106.089,73.781
  L1(Signal) w0.3: U3.1 89.075,94.175 89.574,94.175 89.649,94.1 89.9,94.1 v3(90.5,93.5) ; v3(90.5,92.4) 90.8,92.1 U3.9 ; v3(91.6,93.5) 91.65,93.5 92.325,94.175 93.025,94.175 U3.18 ; U3.11 U3.11@91.825,90.95 ; C8.2@95.769,93.669 C8.2 ; C11.2 105.8,73.01 106.089,73.299 106.089,73.781 ; 107.877,80.05 108.75,80.05 109.087,80.387 C12.2@109.687,80.387
  L1(Signal) w0.4: C18.1 89.119,71.706 89.986,70.839 Y1.4@89.986,70.086 ; C17.1 92.941,72.5 93.147,72.294 93.147,72.234 v2@93.857,71.524 ; C14.2 99.265,77.065 99.756,77.065 ; C13.2 100.109,83.471 100.658,83.471 100.962,83.166 v2(101.016,83.166) ; C9.2@114.4,97.6 C9.2@114.4,97.155 ; C9.2 114.469,97.155 C9.2@114.4,97.155 ; J2.5@115.018,92.321 115.018,94.182 114.4,94.8 C9.2@114.4,97.155 ; v2(125.129,80.37) 125.139,80.36 127.19,80.36 J1.5
  L1(Signal) w0.5: v2(86.688,88.489) 86.703,88.504 87.943,88.504 C6.1 ; C18.1 89.119,75.524 92.218,78.624 95.276,78.624 C16.2 96.957,78.533 C15.2 ; v2(90.297,56.007) 90.324,56.007 90.36,56.043 J3.6 ; Y1.2@92.13,68.27 92.122,68.263 92.122,66.602 v2(92.142,66.583) ; C7.2 93.32,88.492 94.948,88.492 v2(94.956,88.484) ; C5.1 93.764,97.014 95.109,97.014 v2(95.123,97.028) ; C8.2 95.805,93.695 97.67,93.695 v2(97.675,93.69) ; C15.2 98.181,79.758 98.19,79.767 99.336,79.767 v2(99.352,79.783) ; v2(100.415,86.434) 100.428,86.446 101.788,86.446 R3.1 ; C10.2@105.765,68.989 105.768,68.986 105.779,68.997 v2(107.407,68.997) ; C10.2@105.8,69.024 C11.2 ; R4.2 R4.2 109.551,71.46 v2(109.552,71.459) ; v2(112.776,97.155) C9.2@114.4,97.155
  other v1: 85.974,51.032 87.974,51.032 89.974,51.032 91.974,51.032 111.974,51.032 113.974,51.032 115.974,51.032 117.974,51.032 119.974,51.032 121.974,51.032 123.974,51.032 125.974,51.032 86.974,53.032 88.974,53.032 100.974,53.032 102.974,53.032 104.974,53.032 106.974,53.032 108.974,53.032 112.974,53.032 114.974,53.032 116.974,53.032 118.974,53.032 120.974,53.032 122.974,53.032 124.974,53.032 83.974,55.032 85.974,55.032 87.974,55.032 89.974,55.032 101.974,55.032 103.974,55.032 105.974,55.032 115.974,55.032 117.974,55.032 119.974,55.032 121.974,55.032 123.974,55.032 125.974,55.032 84.974,57.032 86.974,57.032 88.974,57.032 102.974,57.032 104.974,57.032 118.974,57.032 120.974,57.032 122.974,57.032 124.974,57.032 126.974,57.032 128.974,57.032 83.974,59.032 85.974,59.032 87.974,59.032 89.974,59.032 97.974,59.032 101.974,59.032 103.974,59.032 105.974,59.032 123.974,59.032 125.974,59.032 127.974,59.032 84.974,61.032 86.974,61.032 88.974,61.032 90.974,61.032 92.974,61.032 98.974,61.032 102.974,61.032 104.974,61.032 106.974,61.032 116.974,61.032 118.974,61.032 126.974,61.032 128.974,61.032 83.974,63.032 85.974,63.032 87.974,63.032 89.974,63.032 91.974,63.032 93.974,63.032 97.974,63.032 101.974,63.032 103.974,63.032 105.974,63.032 125.974,63.032 127.974,63.032 84.974,65.032 86.974,65.032 88.974,65.032 90.974,65.032 92.974,65.032 98.974,65.032 102.974,65.032 104.974,65.032 106.974,65.032 114.974,65.032 126.974,65.032 128.974,65.032 83.974,67.032 85.974,67.032 87.974,67.032 93.974,67.032 101.974,67.032 103.974,67.032 105.974,67.032 107.974,67.032 125.974,67.032 127.974,67.032 84.974,69.032 86.974,69.032 94.974,69.032 126.974,69.032 128.974,69.032 83.974,71.032 85.974,71.032 87.974,71.032 95.974,71.032 111.974,71.032 127.974,71.032 84.974,73.032 86.974,73.032 94.974,73.032 96.974,73.032 98.974,73.032 112.974,73.032 116.974,73.032 118.974,73.032 83.974,75.032 85.974,75.032 87.974,75.032 95.974,75.032 113.974,75.032 117.974,75.032 119.974,75.032 84.974,77.032 86.974,77.032 88.974,77.032 108.974,77.032 110.974,77.032 112.974,77.032 116.974,77.032 118.974,77.032 120.974,77.032 122.974,77.032 83.974,79.032 85.974,79.032 87.974,79.032 89.974,79.032 91.974,79.032 84.974,81.032 86.974,81.032 88.974,81.032 90.974,81.032 92.974,81.032 110.974,81.032 116.974,81.032 118.974,81.032 120.974,81.032 122.974,81.032 83.974,83.032 85.974,83.032 87.974,83.032 89.974,83.032 91.974,83.032 93.974,83.032 95.974,83.032 115.974,83.032 117.974,83.032 119.974,83.032 121.974,83.032 123.974,83.032 106.91,84.041 84.974,85.032 86.974,85.032 94.974,85.032 98.974,85.032 110.974,85.032 112.974,85.032 114.974,85.032 118.974,85.032 120.974,85.032 122.974,85.032 124.974,85.032 126.974,85.032 128.974,85.032 108.496,85.453 105.746,86.023 83.974,87.032 85.974,87.032 87.974,87.032 91.974,87.032 93.974,87.032 123.974,87.032 125.974,87.032 127.974,87.032 107.703,87.857 84.974,89.032 118.974,89.032 124.974,89.032 126.974,89.032 128.974,89.032 83.974,91.032 85.974,91.032 87.974,91.032 107.974,91.032 111.974,91.032 119.974,91.032 123.974,91.032 125.974,91.032 127.974,91.032 119.717,92.812 84.974,93.032 86.974,93.032 98.974,93.032 102.974,93.032 110.974,93.032 122.974,93.032 124.974,93.032 126.974,93.032 128.974,93.032 112.684,93.079 108.505,93.549 85.974,95.032 87.974,95.032 93.974,95.032 95.974,95.032 101.974,95.032 103.974,95.032 105.974,95.032 109.974,95.032 111.974,95.032 119.974,95.032 123.974,95.032 125.974,95.032 127.974,95.032 86.974,97.032 98.974,97.032 100.974,97.032 102.974,97.032 104.974,97.032 106.974,97.032 110.974,97.032 122.974,97.032 124.974,97.032 107.891,98.741 97.918,98.747 99.918,98.747 101.918,98.747 103.918,98.747 105.918,98.747 109.656,98.764 119.34,99.069 121.34,99.069 123.34,99.069
  other v2: 121.519,62.175 121.369,63.735 113.379,63.806 121.378,65.884 123.898,67.377 121.92,68.326 93.932,71.418
  other v3: 101.636,75.6 102.736,75.6 103.836,75.6 104.936,75.6 102.736,76.7 103.836,76.7 104.936,76.7 106.036,76.7 101.636,77.8 102.736,77.8 103.836,77.8 104.936,77.8 106.036,77.8 101.636,78.9 102.736,78.9 103.836,78.9 104.936,78.9 106.036,78.9 102.736,80 103.836,80 104.936,80
IMU_CPUOUT: C5.2 U3.20 | length 2.3
  L1(Signal) w0.3: U3.20 91.798,94.927 91.798,95.564 92.285,96.051 92.285,96.985 C5.2
IMU_INT: U2.45 U3.12 | length 15.1
  L1(Signal) w0.25: U3.12 94.055,90.975 102.586,82.443 U2.45
IMU_REGOUT: C7.1 U3.10 | length 2.6
  L1(Signal) w0.3: U3.10 91.325,90.95 91.325,90.289 91.7,89.914 C7.1
IMU_SCL: R6.1 U2.42 U3.23 | length 30.8
  L1(Signal) w0.25: U2.42 104.086,81.994 104.466,82.373 R6.1@104.466,88.305
  L1(Signal) w0.3: U3.23 90.3,98.388 91.212,99.3 95.227,99.3 104.471,90.055 R6.1
IMU_SDA: R5.1 U2.43 U3.24 | length 32.1
  L1(Signal) w0.25: v4(88.5,98.9) 88.5,97.3 89.8,96 U3.24 ; v4(101.42,90.989) 103.114,89.296 R5.1 103.114,83.652 103.578,83.188 103.578,81.484 103.586,81.475 U2.43
  L4(Signal) w0.25: v4(88.5,98.9) 94.7,98.9 101.42,92.18 v4(101.42,90.989)
LED_PWR_K: D1.1 R1.2 | length 3.4
  L1(Signal) w0.4: D1.1@124.7,61.715 124.7,63.2 124.885,63.385 R1.2
  L1(Signal) w0.5: D1.1 D1.1@124.7,61.715
MCU_BOOT0: R3.2 U2.44 | length 4.5
  L1(Signal) w0.25: R3.2 101.8,83.877 103.086,82.591 U2.44
MCU_LED_A: DS1.1 U2.26 | length 2.3
  L1(Signal) w0.25: U2.26 109.533,75.55 DS1.1
MCU_LED_C: DS1.2 R4.1 | length 2.8
  L1(Signal) w0.5: DS1.2 111.009,75.477 111.5,74.986 R4.1
MCU_NRST: C9.1 J2.3 R2.1 U2.7 | length 47.4
  L1(Signal) w0.25: v2(97.9,77.3) 97.995,77.3 98.245,77.55 U2.7
  L1(Signal) w0.3: C9.1@116,97.588 116,95.6 116.3,95.3 J2.3@116.3,92.285 ; C9.1@116.096,97.17 C9.1 116.086,97.203 116.086,98.839 v4@116.474,99.227 ; C9.1@116.126,97.201 116.207,97.282 R2.1
  L4(Signal) w0.3: v2(97.9,77.3) 97.166,77.3 96.883,77.583 96.883,86.492 100.05,89.66 102.233,89.66 111.804,99.231 v4(116.488,99.231)
MCU_OSC_IN: C18.2 U2.5 Y1.1 | length 19.2
  L1(Signal) w0.25: Y1.1 90,68.3 90.875,69.175 90.875,70.714 90.2,71.389 C18.2 90.2,75.03 91.636,76.465 95.631,76.465 97.716,78.55 U2.5
MCU_OSC_OUT: R7.2 U2.6 | length 9.2
  L1(Signal) w0.25: R7.2 93.249,74.549 93.249,75.404 93.571,75.726 94.643,75.726 94.983,76.065 95.82,76.065 97.802,78.047 98.965,78.047 98.967,78.05 U2.6
MCU_PA4: J3.2 U2.14 | length 24.6
  L1(Signal) w0.25: J3.2@94.775,52.654 94.775,66.941 101.586,73.753 U2.14
MCU_PA5: J3.3 U2.15 | length 24.2
  L1(Signal) w0.25: J3.3@95.993,52.693 95.993,66.784 102.086,72.877 U2.15
MCU_PA6: J3.4 U2.16 | length 23.9
  L1(Signal) w0.25: J3.4@97.275,52.693 97.275,66.799 102.586,72.111 U2.16
MCU_PA7: J3.5 U2.17 | length 21.6
  L1(Signal) w0.25: J3.5@99.125,55.125 100.35,55.125 100.496,55.271 100.496,69.035 103.086,71.625 U2.17
MCU_SWCLK: J2.4 U2.37 | length 14.8
  L1(Signal) w0.25: U2.37 106.586,82.137 111.988,87.539 114.779,87.539 116.306,89.066 J2.4@116.306,90.309
MCU_SWDIO: J2.2 U2.34 | length 17.3
  L1(Signal) w0.25: U2.34 110.287,79.55 110.289,79.548 111,79.548 117.57,86.118 J2.2@117.57,90.382
MCU_SWO: J2.6 U2.39 | length 15.2
  L1(Signal) w0.25: U2.39 105.586,84.086 110.6,89.1 114.1,89.1 114.7,89.7 115.054,90.054 J2.6@115.054,90.411
MCU_VCAP: C10.1 U2.22 | length 6.3
  L1(Signal) w0.25: 105.583,73.736 105.583,74.121 105.586,74.125 U2.22@105.586,74.396
  L1(Signal) w0.3: C10.1 103.424,71.361 105.583,73.52 105.583,73.736
USB_D_N: J1.2 U2.32 | length 20
  L1(Signal) w0.26: U2.32 107.238,78.548 117.248,78.548 117.303,78.493 127.107,78.493 J1.2
USB_D_P: J1.3 U2.33 | length 20
  L1(Signal) w0.26: U2.33 117.4,79.051 117.495,78.957 127.107,78.957 J1.3
VBUS: C4.1 FB1.1 J1.1
VCC: C1.1 C6.2 C8.1 C11.1 C12.1 C13.1 C14.1 C15.1 C16.1 D1.2 J2.1 J3.1 R2.2 R5.2 R6.2 U1.2 U1.4 U2.1 U2.3@101.086,81.2 U2.9 U2.24 U2.36 U3.8 U3.13 | length 184.5
  L1(Signal) w0.25: U3.13@93.065,91.685 93.736,91.685 ; 99.726,80.554 100.157,80.554 100.161,80.55 U2.1@100.432,80.55 ; 99.747,76.515 99.782,76.55 U2.9@100.431,76.55 ; U2.1 100.711,80.55 100.711,80.664 100.973,80.925 101.086,80.925 U2.3@101.086,81.2 ; 101.085,81.952 101.085,81.476 101.086,81.475 U2.3@101.086,81.201 ; U2.24 106.586,74.125 106.588,74.124 106.588,73.792 ; U2.36 107.862,80.55
  L1(Signal) w0.3: 90.305,90.284 U3.8@90.305,90.97 ; 93.75,91.671 94.168,91.671 ; C13.1 99.249,82.884 99.841,82.292 100.744,82.292 101.085,81.952 ; R6.2 105.808,88.847 105.808,89.044 v4(106.401,89.637) ; C11.1@106.588,72.312 106.588,73.764 ; 107.865,80.547 108.473,80.547 109.126,81.2 C12.1 C12.1@109.69,81.21 ; v2(109.68,82.772) v2@109.69,82.762 ; C1.1@120.099,59.016 122.541,59.016 123.185,59.659 D1.2
  L1(Signal) w0.4: v2(89.372,86.712) 89.39,86.729 89.39,88.501 C6.2 89.393,88.534 89.393,89.266 90.305,90.178 90.305,90.284 ; 94.168,91.671 94.56,92.063 C8.1@95.817,92.063 ; C16.1 97.851,80.886 C15.1 98.18,81.837 98.684,82.34 v2(98.684,82.394) ; C8.1 C8.1@95.876,92.088 ; C8.1@95.817,92.071 C8.1@95.817,92.063 ; C8.1@95.901,92.063 C8.1@95.817,92.063 ; v2(96.601,90.199) 96.601,90.254 95.817,91.037 C8.1@95.817,92.063 ; v2(97.099,75.42) 97.153,75.42 97.203,75.469 98.469,75.469 C14.1 99.303,75.5 99.537,75.734 99.537,76.305 99.747,76.515 ; v2(97.764,84.055) 97.818,84.055 98.343,83.531 C13.1@99.223,83.531 ; C15.1@98.183,80.554 99.726,80.554 ; v4@100.361,88.296 101.464,88.296 ; 101.464,88.299 R5.2@102.311,88.299 ; v2@109.043,69.43 v2(109.082,69.391) ; C12.1@109.69,81.21 v2@109.69,82.762 ; J2.1@117.857,92.18 118.751,93.074 118.751,95.451 119.496,96.196 R2.2 ; R2.2@119.499,97.279 121.097,97.279 122.175,96.201 122.175,94.455 v4(122.143,94.423)
  L1(Signal) w0.5: J3.1 93.543,52.681 93.543,51.493 94.079,50.957 95.517,50.957 ; C11.1 107.184,72.3 109.043,70.441 v2@109.043,69.457
  L1(Signal) w0.75: 95.533,50.973 97.596,50.973 ; C8.1@95.84,92.128 97.891,92.128 100.29,89.73 v4@100.29,88.255
  L1(Signal) w1: 97.625,51.003 110.253,51.003 111.1,51.85 U1.4
  L4(Signal) w0.4: 89.372,86.053 v2(89.372,86.712) ; 96.627,89.377 v2@96.627,90.173 ; v2(97.099,75.42) 98.684,77.004 v2(98.684,82.394) ; v2(97.764,84.055) 97.764,85.76 100.243,88.24 v4(100.305,88.24) 101.031,87.513 105.875,87.513 106.396,88.035 106.396,89.093 ; 106.401,89.097 v4(106.401,89.637) ; 106.401,90.475 v4(106.401,89.637) ; 107.287,89.637 v4(106.401,89.637) ; 111.108,68.511 111.178,68.582
  L4(Signal) w0.5: 89.372,86.053 89.372,85.645 89.679,85.339 90.335,85.339 ; 96.621,88.724 96.621,89.371 ; 106.401,90.475 106.401,91.021 ; 107.287,89.637 108.678,89.637 ; v2(111.108,64.233) 111.108,68.511 ; 122.143,92.126 v4(122.143,94.423)
  L4(Signal) w0.75: 90.335,85.339 93.941,85.339 96.617,88.015 96.617,88.72 ; 106.401,91.021 106.401,91.576 107.002,92.177 ; 108.678,89.637 109.714,88.601 109.714,86.803 ; 122.18,90.408 122.18,92.089
  L4(Signal) w1: 107.036,92.142 109.093,92.142 113.732,87.503 121.598,87.503 122.184,88.089 122.184,90.28 ; v2(109.082,69.391) 110.357,69.391 111.139,68.609 ; v2@109.676,82.776 109.676,86.765 109.691,86.781 ; v2(109.68,82.772) 112.728,82.772 115.25,80.25 115.25,71.5 112.332,68.582 111.178,68.582
XTAL_IN: C17.2 R7.1 Y1.3 | length 4.8
  L1(Signal) w0.3: R7.1 91.624,74.474 91.624,73.551 91.8,73.375 C17.2 ; C17.2@91.826,72.5 91.826,71.621 92.164,71.283 92.164,70.064 Y1.3
pads on no net: J1.4 J1.6 J1.7 J1.8 J1.9 J1.10 J1.11 J2. U2.2 U2.3@100.436,79.55 U2.4 U2.10 U2.11 U2.12 U2.13 U2.18 U2.19 U2.20 U2.21 U2.25 U2.27 U2.28 U2.29 U2.30 U2.31 U2.38 U2.40 U2.41 U2.46 U3.2 U3.3 U3.4 U3.5 U3.6 U3.7 U3.14 U3.15 U3.16 U3.17 U3.19 U3.21 U3.22

## Polygon pours and split planes (outlines as drawn)
GND on L1(Signal) "GND_L01_P042" (solid, pour order 42): 120.19,61.671 120.439,61.422 122.407,61.422 122.407,63.167 123.158,63.918 123.158,66.898 123.203,66.944 124.221,66.944 124.781,67.504 124.781,68.602 124.79,68.624 124.79,70.47 124.541,70.718 121.94,70.718 121.691,70.47 118.995,70.47 118.25,69.725 118.25,67.492 118.995,66.75 118.995,63.445 118.77,63.221 116.484,63.221 116.473,63.232 115.27,63.244 114.194,64.32 113.733,64.32 113.212,64.841 113.2,64.829 112.03,64.829 111.722,64.521 111.722,62.405 111.935,62.192 114.761,62.192 115.282,61.671
+5V on L1(Signal) "+5V_L01_P037" (solid, pour order 37): 116.586,65.38 116.23,65.735 110.592,65.735 110.592,65.71 109.674,64.792 109.674,61.883 109.446,61.656 108.197,61.656 108.001,61.851 108.001,66.167 110.566,68.732 115.214,68.732 118.126,71.644 119.168,71.644 119.363,71.838 120.336,71.838 120.482,71.692 120.482,70.654 120.158,70.329 119.801,70.329 119.071,69.599 119.055,69.599 118.821,69.366 118.821,67.259 117.881,66.319 117.881,63.475 117.627,63.221 116.789,63.221 116.586,63.424
VCC on L1(Signal) "VCC_L01_P035" (solid, pour order 35): 107.261,56.414 107.261,55.473 107.73,55.003 108.682,55.016 108.692,55.005 115.005,55.005 118.395,58.395 120.269,58.395 120.269,58.42 120.421,58.572 120.421,59.487 120.294,59.614 116.345,59.614 114.873,61.086 112.643,61.086 111.895,61.834 111.895,63.139 111.793,63.242 111.793,64.717 111.66,64.849 110.624,64.849 110.478,64.704 110.478,63.25 110.487,63.242 110.363,63.118 110.363,61.85 110.358,61.844 110.439,61.763 107.261,58.584
VBUS on L1(Signal) "VBUS_L01_P038" (solid, pour order 38): 121.056,71.817 121.056,73.99 125.146,78.08 127.926,78.08 127.971,78.035 127.971,77.45 127.892,77.371 126.419,77.371 125.654,76.606 125.654,71.349 124.866,70.561 122.014,70.561 121.937,70.485 121.029,70.485 120.94,70.573 120.94,70.574 120.917,70.598 120.917,70.604 120.913,70.745 120.913,71.612 120.904,71.621 120.904,71.665
GND on L3(GND) "GND_L03_P041" (solid, pour order 41): 81.964,98.027 cw(c83.964,98.027) 83.964,100.027 127.964,100.027 cw(c127.964,98.027) 129.964,98.027 129.964,52.027 cw(c127.964,52.027) 127.964,50.027 82.964,50.027 cw(c82.964,51.027) 81.964,51.027 81.964,98.027
GND on L2(GND) "GND_L02_P039" (solid, pour order 39): 82,98 cw(c84,98) 84,100 128,100 cw(c128,98) 130,98 130,52 cw(c128,52) 128,50 83,50 cw(c83,51) 82,51 82,98

## Silkscreen, mask and mechanical layers (free items; w line width, h text height)
Top Overlay:
  text "IMU" at 88.731,95.708 h0.8
  text "SWD" at 111.6,86.1 h1.52
  text "USB" at 125.943,72.714 h1.52
  text "MCU" at 100.118,71.831 h1.52
  text "XTAL" at 88.7,65.796 h0.8
  text "GPIO" at 91.041,58.445 h1.52
Mechanical 1:
  lines w0.254: 81.106,51.375 81.106,98.887 cw(c83.731,98.762) 83.856,101.387 128.875,101.387 ; 81.107,51.426 ccw(c83.731,51.279) 83.606,48.654 ; 83.625,48.649 128.617,48.649 ccw(c128.742,51.274) 131.367,51.149 131.367,98.625 ; 128.875,101.375 cw(c128.75,98.75) 131.375,98.625